# Altium PCB PCB2.PcbDoc (part 3 of 4)
Units mil, origin at the board's own origin, x right, y up, seen from the top; angles counter-clockwise.
Board outline 7874.02 x 7086.61 mil, 2 copper layers (Top Layer, Bottom Layer); 393 components, 284 nets, 1417 pads, 404 vias.
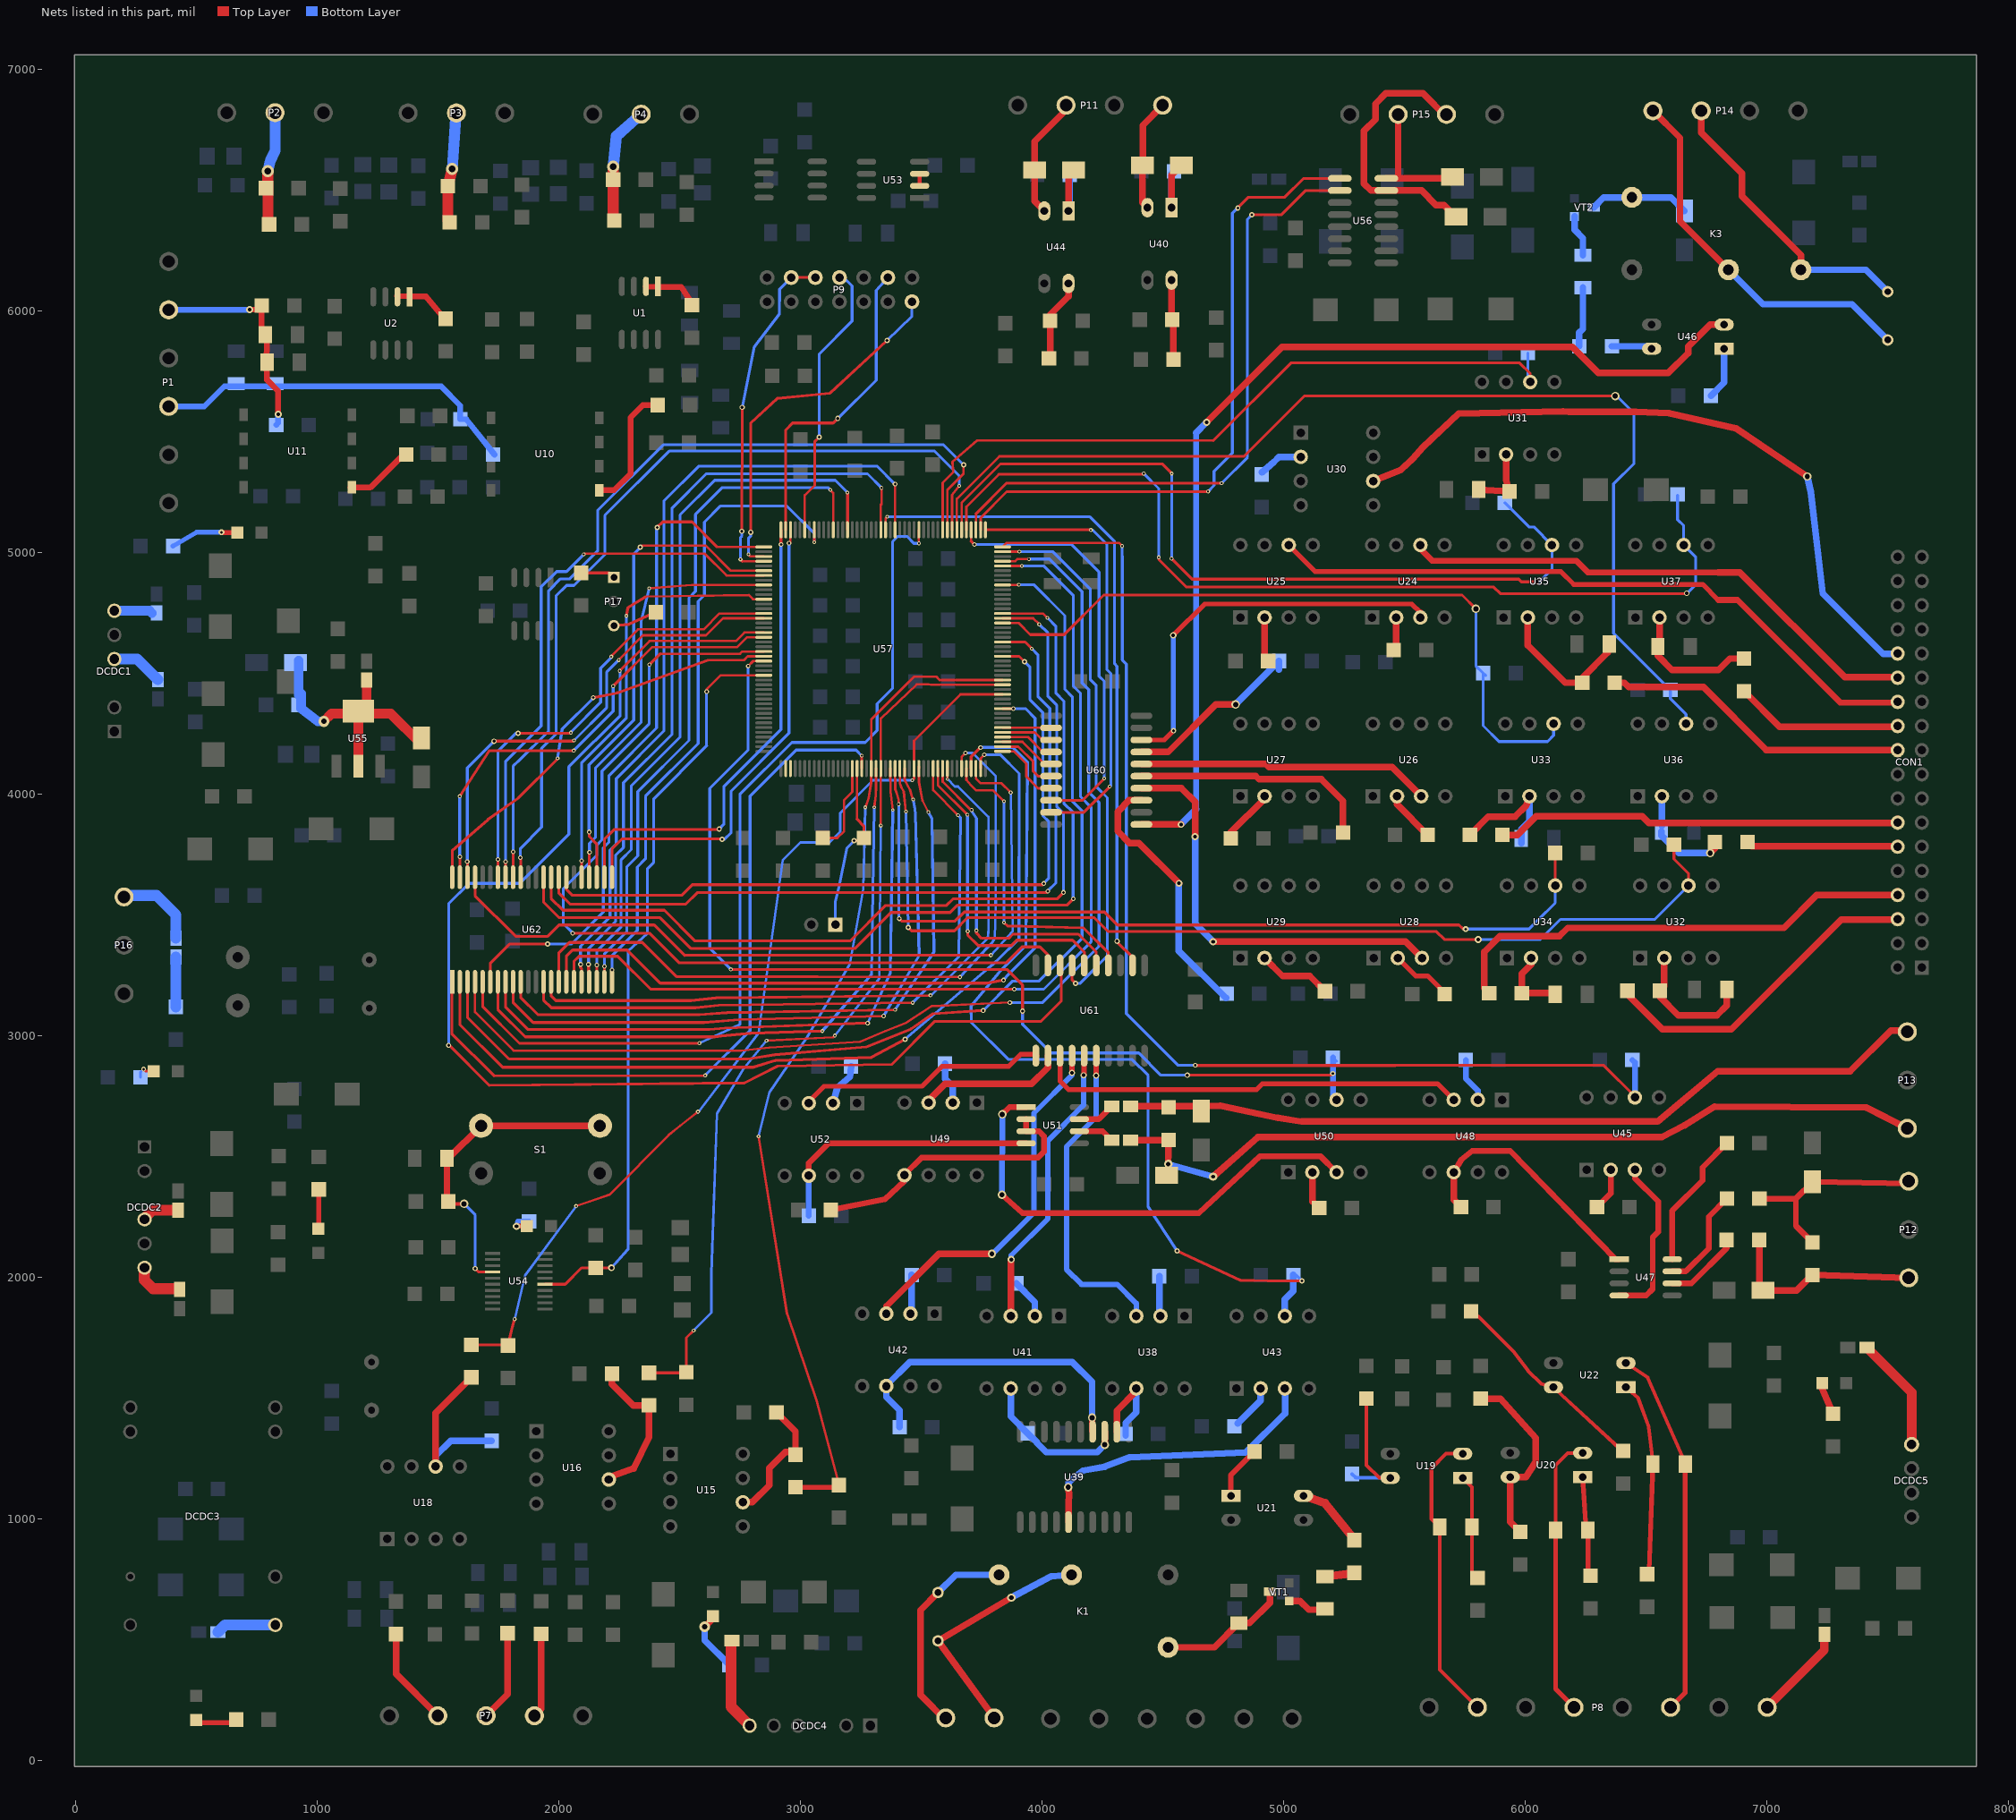
[diagram p3: the nets of this part, all layers, seen from the top]

## Via types
v1: diameter 22, hole 12, Top Layer to Bottom Layer, 63 vias
v2: diameter 19, hole 11, Top Layer to Bottom Layer, 42 vias
v3: diameter 50, hole 28, Top Layer to Bottom Layer, 34 vias
v4: diameter 15, hole 8, Top Layer to Bottom Layer, 27 vias
v5: diameter 35, hole 22, Top Layer to Bottom Layer, 25 vias
v6: diameter 16, hole 8, Top Layer to Bottom Layer, 23 vias
v7: diameter 30, hole 15, Top Layer to Bottom Layer, 22 vias
v8: diameter 22, hole 11, Top Layer to Bottom Layer, 14 vias
v9: diameter 17, hole 8, Top Layer to Bottom Layer, 13 vias
v10: diameter 35, hole 20, Top Layer to Bottom Layer, 12 vias
v11: diameter 16, hole 7, Top Layer to Bottom Layer, 10 vias
v12: diameter 18, hole 8, Top Layer to Bottom Layer, 9 vias
v13: diameter 25, hole 15, Top Layer to Bottom Layer, 8 vias
v14: diameter 40, hole 22, Top Layer to Bottom Layer, 8 vias
v15: diameter 45, hole 22, Top Layer to Bottom Layer, 7 vias
v16: diameter 25, hole 12, Top Layer to Bottom Layer, 6 vias
v17: diameter 15, hole 7, Top Layer to Bottom Layer, 6 vias
v18: diameter 15, hole 9, Top Layer to Bottom Layer, 6 vias
v19: diameter 35, hole 18, Top Layer to Bottom Layer, tented bottom, 6 vias
v20: diameter 27, hole 15, Top Layer to Bottom Layer, 5 vias
v21: diameter 40, hole 18, Top Layer to Bottom Layer, 4 vias
v22: diameter 50, hole 30, Top Layer to Bottom Layer, 4 vias
v23: diameter 14, hole 7, Top Layer to Bottom Layer, 4 vias
v24: diameter 157.48, hole 137.8, Top Layer to Bottom Layer, 4 vias
v25: diameter 35, hole 15, Top Layer to Bottom Layer, 4 vias
v26: diameter 35, hole 18, Top Layer to Bottom Layer, 3 vias
v27: diameter 25, hole 11, Top Layer to Bottom Layer, 3 vias
v28: diameter 17, hole 9, Top Layer to Bottom Layer, 3 vias
v29: diameter 22, hole 15, Top Layer to Bottom Layer, 3 vias
v30: diameter 30, hole 17, Top Layer to Bottom Layer, 2 vias
v31: diameter 20, hole 12, Top Layer to Bottom Layer, 2 vias
v32: diameter 28, hole 15, Top Layer to Bottom Layer, 2 vias
v33: diameter 45, hole 25, Top Layer to Bottom Layer, 2 vias
v34: diameter 40, hole 18, Top Layer to Bottom Layer, tented bottom, 2 vias
v35: diameter 47, hole 30, Top Layer to Bottom Layer, 1 vias
v36: diameter 30, hole 18, Top Layer to Bottom Layer, 1 vias
v37: diameter 27, hole 17, Top Layer to Bottom Layer, 1 vias
v38: diameter 12, hole 7, Top Layer to Bottom Layer, 1 vias
v39: diameter 18, hole 10, Top Layer to Bottom Layer, 1 vias
v40: diameter 45, hole 30, Top Layer to Bottom Layer, 1 vias
v41: diameter 18, hole 11, Top Layer to Bottom Layer, 1 vias
v42: diameter 26, hole 15, Top Layer to Bottom Layer, 1 vias
v43: diameter 18, hole 9, Top Layer to Bottom Layer, 1 vias
v44: diameter 50, hole 32, Top Layer to Bottom Layer, 1 vias
v45: diameter 24, hole 15, Top Layer to Bottom Layer, 1 vias
v46: diameter 50, hole 22, Top Layer to Bottom Layer, 1 vias
v47: diameter 20, hole 10, Top Layer to Bottom Layer, 1 vias
v48: diameter 17, hole 7, Top Layer to Bottom Layer, 1 vias
v49: diameter 34, hole 15, Top Layer to Bottom Layer, 1 vias
v50: diameter 35, hole 17, Top Layer to Bottom Layer, 1 vias

## Nets (pads, with @x,y where several pads share a name; then routed paths per layer and width w, separated by ;. In a path a pad name is that pad's centre, name@x,y a point inside that pad or via, vN(x,y) a via of type N, cw(c..) or ccw(c..) an arc to the next point about the centre after c; other vN are vias at no path point) (continued)
NetCON1_24: CON1.24 U25.6 | length 2798.5
  Top Layer w20: U25.6@5022,5032 5131,4923 6148,4923 6202,4869 6736,4869 6800,4805 ; CON1.24@7525,4380 CON1.24@7543,4398
  Top Layer w25: 6800,4805 6880,4805 7305,4380 CON1.24@7525,4380
NetCON1_26: CON1.26 U24.6 | length 2217.3
  Top Layer w20: U24.6@5567,5016 U24.6@5567,5032 ; CON1.26@7530,4485 CON1.26@7543,4498
  Top Layer w25: U24.6@5567,5016 5616,4967 6212,4967 6260,4919 6800,4919
  Top Layer w27.56: 6800,4919 6890,4919 7324,4485 CON1.26@7530,4485
NetCON1_28: CON1.28 U30.6 | length 2877.9
  Top Layer w27.56: U30.6@5372,5297 5488,5344 5535,5389 5578,5437 5725,5576 6157,5585 6182,5584 6460,5584 6596,5578 6874,5515 v5(7169,5316)
  Bottom Layer w27.56: v5(7169,5316) 7184,5251 7233,4832 7483,4582 7527,4582 CON1.28@7543,4598
NetD1_1: D1.1 D2.2 P1.3 R6.1 R7.2 | length 1544
  Bottom Layer w24: P1.3@385,5606 532,5606 615,5689 1513,5689 1592,5610 R7.2@1592,5553 1617,5553 R6.1@1734,5406
NetD3_1: D3.1 D4.2 P1.5 R14.1 R16.2 | length 895.8
  Top Layer w24: v7(720,6007) 753,6006 R16.2@770,6023 770,5918.07 D4.2@785.07,5903 ; D4.2@786.07,5881 792.07,5875 789,5787 792.07,5715.93 ; 792,5716 838,5670 v7(838,5573)
  Bottom Layer w24: P1.5@385,6006 719,6006 v7(720,6007) ; R14.1@830,5529 838,5537 v7(838,5573)
NetD14_1: D14.1 P8.7 U19.2 | length 1222.6
  Top Layer w15: U19.2@5742,1270 5673,1270 5613,1210 5613,1000.07 D14.1@5647.07,966 5647.07,375.93 P8.7@5803,220
NetD14_2: D14.2 R55.2 U19.1 | length 439.7
  Top Layer w15: U19.1@5742,1170 5780.93,1131.07 D14.2@5780.93,966 5780.93,779.07 R55.2@5804,756
NetD15_1: D15.1 P8.5 U20.2 | length 1167.1
  Top Layer w15: D15.1@6127.07,953 6127.07,1223.07 6177,1273 U20.2@6239,1273
  Top Layer w20: D15.1@6127.07,953 6127.07,295.93 P8.5@6203,220
NetD15_2: D15.2 R58.2 U20.1 | length 418.5
  Top Layer w15: D15.2@6253,956 D15.2@6260.93,953 ; R58.2@6260.93,776.07 R58.2@6272,765
  Top Layer w20: U20.1@6239,1173 D15.2@6253,956 ; R58.2@6260.93,776.07 D15.2@6260.93,953
NetD16_1: D16.1 VT1.2 | length 164.4
  Top Layer w27.56: VT1.2@5024,660.5 5068.5,660.5 5105,624 5168.93,624 D16.1@5172,627.07
NetD16_2: D16.2 R61.2 | length 119.8
  Top Layer w35: D16.2@5172,760.93 R61.2@5291,775
NetD17_2: D17.2 K1.6 VT1.1 | length 556.7
  Top Layer w27.56: K1.6@4522.64,468.39 4714.31,468.39 D17.2@4815,569.07 4860.07,569.07 4944,653 VT1.1@4944,698.5
  Bottom Layer w27.56: K1.6@4522.64,468.39 K1.6@4532.11,477.85
NetD18_1: D18.1 P8.3 U22.2 | length 1541.2
  Top Layer w15: U22.2@6418,1645 6508,1586 6665.23,1227.38 D18.1@6668,1218
  Top Layer w20: P8.3@6603,220 6663.93,280.93 D18.1@6663.93,1227
NetD18_2: D18.2 R63.2 U22.1 | length 808.3
  Top Layer w15: U22.1@6418,1545 6468,1502 6513,1380 D18.2@6530.07,1227 ; R63.2@6506,771 R63.2@6514,785
  Top Layer w20: R63.2@6514,785 D18.2@6530.07,1227
NetD21_2: D21.2 R77.1 U31.2 | length 282.3
  Top Layer w27.56: D21.2@5808.93,5262 R77.1@5936,5254 5922,5302 U31.2@5922,5407
NetD22_2: D22.2 R79.1 U32.2 | length 560.7
  Top Layer w27.56: U32.2@6577,3322 6577,3205 R79.1@6559,3187 6559,3161 6636,3084 6794,3084 6835.93,3125.93 D22.2@6835.93,3192
NetD23_2: D23.2 R80.1 U33.2 | length 533
  Top Layer w27.56: R80.1@5772,3832 5848,3908 5959.67,3908 6003.92,3952.25 U33.2@6018.67,3992
  Bottom Layer w27.56: D23.2@5985.07,3797 5985.07,3855.07 6018.67,3888.67 U33.2@6018.67,3992
NetD24_2: D24.2 R83.1 U34.2 | length 301
  Top Layer w27.56: U34.2@6025.33,3322 6025.33,3295.33 5987,3257 R83.1@5987,3177 6120.07,3177 D24.2@6125.07,3172
NetD25_2: D25.2 R84.1 U35.2 | length 610.6
  Top Layer w27.56: U35.2@6012,4732 6012,4617 6167,4462 R84.1@6237,4462 6237,4482 6342,4587 6342,4615.07 D25.2@6348.93,4622
NetD26_2: D26.2 R87.1 U36.2 | length 425
  Top Layer w27.56: v5(6767,3757) 6787,3777 R87.1@6787,3802
  Bottom Layer w27.56: D26.2@6565.07,3847 6565.07,3828.93 6637,3757 v5(6767,3757) ; D26.2@6567,3870.07 U36.2@6567,3992
NetD27_2: D27.2 R88.1 U37.2 | length 551.6
  Top Layer w27.56: D27.2@6550.07,4612 6550.07,4573.93 6610,4514 6801,4514 6849,4562 R88.1@6907,4562 ; D27.2@6557,4620.07 U37.2@6557,4732
NetD28_1: D28.1 P11.4 U40.2 | length 467.3
  Top Layer w27.56: U40.2@4437,6429 4416.29,6449.71 D28.1@4416.29,6604 4416.29,6633.29 4418,6635 4418,6770 4500,6852 P11.4@4500,6853
NetD28_2: D28.2 R93.1 U40.1 | length 346
  Top Layer w27.56: U40.1@4537,6429 4537,6563.29 D28.2@4577.71,6604
  Bottom Layer w27.56: U40.1@4537,6429 4537,6569 R93.1@4547,6579
NetD29_1: D29.1 P11.2 U44.2 | length 506.6
  Top Layer w27.56: U44.2@4010,6415 3969.29,6455.71 D29.1@3969.29,6585 3969.29,6703.29 4106.5,6840.5 4106.5,6841.5 P11.2@4111,6846
NetD29_2: D29.2 R100.1 U44.1 | length 330.6
  Top Layer w27.56: U44.1@4110,6415 4110,6564.29 D29.2@4130.71,6585
  Bottom Layer w27.56: U44.1@4110,6415 4115,6420 R100.1@4115,6565
NetD30_1: D30.1 VT2.2 | length 175.1
  Bottom Layer w27.56: VT2.2@6205,6392.5 6205,6338 6240,6303 D30.1@6240,6231.93
NetD30_2: D30.2 R110.2 | length 249.3
  Bottom Layer w27.56: R110.2@6225,5855 6225,5912 6240,5927 D30.2@6240,6098.07
NetD31_2: D31.2 K3.6 VT2.1 | length 415.2
  Bottom Layer w27.56: VT2.1@6285,6430.5 6326.11,6471.61 K3.6@6442.36,6471.61 6604.09,6471.61 D31.2@6660,6415.71
NetD33_1: D33.1 R123.1 S1.2 U54.4 | length 1291
  Top Layer w11.81: R123.1@1536.93,2320.33 R123.1@1543,2314.26 ; v1(1654,2036.26) 1667.61,2022.65 U54.4@1726.73,2022.65
  Top Layer w15: R123.1@1553,2304.26 v5(1608,2304.26)
  Top Layer w27.56: R123.1@1536.93,2320.33 D33.1@1536.93,2493.26 1543.67,2493.26 S1.2@1678.26,2627.85 S1.2@2170.26,2627.85
  Bottom Layer w11.81: v5(1608,2304.26) 1654,2258.26 v1(1654,2036.26)
NetD34_1: D34.1 D35.2 L14.1 R125.2 U55.2 U55.4 | length 1199.1
  Top Layer w39.37: v15(1027,4302) 1059.17,4334.17 U55.4@1170,4334.17 ; U55.2@1170,4105.83 U55.4@1170,4334.17 ; L14.1@1204,4472.63 1204,4368.17 U55.4@1170,4334.17 ; D34.1@1444,4229.71 1426.15,4211.85 1303.83,4334.17 U55.4@1170,4334.17
  Bottom Layer w39.37: D35.2@922.71,4554 922.71,4410.71 933,4416 933,4355 1002,4302 v15(1027,4302) v15@1025,4302
NetDCDC1_4: DCDC1.4 L9.1 | length 215.5
  Bottom Layer w45: DCDC1.4@160,4560 254.37,4560 L9.1@340,4474.37
NetDCDC1_6: DCDC1.6 L7.1 | length 158.9
  Bottom Layer w39.37: DCDC1.6@160,4760 305.63,4760 L7.1@315,4750.63
NetDCDC2_4: DCDC2.4 L11.1 | length 154.3
  Top Layer w45: DCDC2.4@284,2244 318.63,2278.63 L11.1@424,2278.63
NetDCDC2_6: DCDC2.6 L10.1 | length 193.3
  Top Layer w45: DCDC2.6@284,2042 284,1989 320,1953 L10.1@409.37,1953
NetDCDC3_14: DCDC3.14 L12.1 | length 250.1
  Bottom Layer w45: L12.1@588.37,531 618.37,561 DCDC3.14@826,561
NetDCDC4_6: DCDC4.6 L15.1 | length 389
  Top Layer w45: L15.1@2713,495 2713,222 DCDC4.6@2795,140
NetDCDC5_4: DCDC5.4 L16.1 | length 477.9
  Top Layer w40: L16.1@7415.37,1709 7601,1523.37 DCDC5.4@7601,1308
NetF1_1: F1.1 L8.2 | length 205.6
  Bottom Layer w45: F1.1@415,3120 L8.2@415,3325.63
NetK1_3: K1.3 P19.1 RV1.2 | length 1036
  Top Layer w27.56: P19.1@3802,176 RV1.2@3570,495 v10(3873,674)
  Bottom Layer w27.56: P19.1@3802,176 P19.1@3807,159 ; v10(3873,674) 4038,762 K1.3@4122.64,768.39
NetK1_4: K1.4 P19.2 RV1.1 | length 894.3
  Top Layer w27.56: RV1.1@3570,695 3497,622 3497,271 P19.2@3608,160
  Bottom Layer w27.56: RV1.1@3570,695 3643.39,768.39 K1.4@3822.64,768.39
NetK3_3: K3.3 P14.1 RV3.2 | length 1567.8
  Top Layer w27.56: P14.1@6530,6830 6642,6718 6642,6371.98 K3.3@6842.36,6171.61
  Bottom Layer w27.56: K3.3@6842.36,6171.61 6984.98,6029 7354,6029 RV3.2@7502,5881
NetK3_4: K3.4 P14.2 RV3.1 | length 1226.4
  Top Layer w27.56: P14.2@6730,6830 6730,6739 6898,6571 6898,6477 7142.36,6232.64 K3.4@7142.36,6171.61
  Bottom Layer w27.56: K3.4@7142.36,6171.61 7411.39,6171.61 RV3.1@7502,6081
NetL1_1: L1.1 P8.1 | length 399.8
  Top Layer w35.43: P8.1@7003,220 7240,457 L1.1@7240,521.63
NetL5_1: L5.1 U51.6 | length 149
  Top Layer w24: U51.6@4155,2605 4251.63,2605 L5.1@4288.63,2568
NetL5_2: L5.2 P13.3 R119.2 TVS3.2 | length 3491.8
  Top Layer w27.56: L5.2@4367.37,2568 4524,2568 TVS3.2@4523,2416 ; v25(4709,2417) 4895,2581 6567,2581 6659.72,2628.72 ; 6660.72,2628.72 6785,2707 7412,2704 P13.3@7583,2617
  Bottom Layer w27.56: v10(4523,2469) v25(4709,2417)
NetL6_1: L6.1 U51.7 | length 155.6
  Top Layer w24: U51.7@4155,2655 4235.63,2655 L6.1@4288.63,2708
NetL6_2: L6.2 P13.1 R119.1 TVS6.1 | length 3374.7
  Top Layer w27.56: L6.2@4367.37,2708 4650.71,2708 4739,2711 4978,2660 5075,2645 6549,2645 6798,2853 7346,2853 7515,3022 P13.1@7590,3021
NetL8_1: L8.1 P16.3 | length 335.8
  Bottom Layer w45: P16.3@209,3581 335,3581 415,3501 L8.1@415,3404.37
NetLED1_K: 24V_IN.K R134.2 | length 83.7
  Top Layer w10: v31(281,2862) 289,2854 24V_IN.K@322,2854
  Bottom Layer w10: R134.2@268,2828 268,2849 v31(281,2862)
NetLED2_K: +15V_C.K R135.2 | length 157
  Top Layer w20: +15V_C.K@1006,2207 R135.2@1006,2364
NetLED3_K: +15V_A.K R136.2 | length 280.4
  Top Layer w20: v27@605,5083 +15V_A.K@669,5083 ; +15V_A.K@669,5085 +15V_A.K@670,5085
  Bottom Layer w20: R136.2@403,5028 501,5085 v27(603,5085)
NetLED4_K: 3.3V.K R137.2 | length 109.6
  Top Layer w20: v7(1825,2212) 3.3V.K@1867,2212
  Bottom Layer w20: v7(1825,2212) 1830,2232 R137.2@1877,2232
NetLED5_K: +12V_P.K R138.2 | length 259.3
  Top Layer w27.56: v15(2604,553) 2638,587 +12V_P.K@2638,598
  Bottom Layer w27.56: v15(2604,553) 2604,497 R138.2@2706,395
NetLED6_K: +5V.K R139.2 | length 166.4
  Top Layer w20: +5V.K@503,156 651,156 R139.2@664,169
NetLED7_K: +5V_COM.K R140.2 | length 156.6
  Top Layer w27.56: +5V_COM.K@7231,1563 7224,1556 R140.2@7276,1435 R140.2@7264,1426
NetP2_2: P2.2 R2.1 R5.2 | length 441.9
  Top Layer w45: v3(795,6580) R2.1@796,6383 ; P2.2@819,6816 P2.2@826,6809
  Bottom Layer w45: v3(795,6580) 805,6622 826,6665 P2.2@826,6809
NetP3_2: P3.2 R9.1 R10.2 | length 465.7
  Top Layer w45: R9.1@1548,6368 1541,6375 R10.2@1541,6518 v3(1559,6589)
  Bottom Layer w45: v3(1559,6589) P3.2@1575,6828
NetP4_2: P4.2 R15.1 R18.2 | length 495.2
  Top Layer w45: v3(2225,6599) R18.2@2225,6545 2225,6380 R15.1@2230,6375
  Bottom Layer w45: v3@2225,6594 2238,6725 P4.2@2341,6816
NetP7_2: P7.2 R44.1 | length 350.6
  Top Layer w27.56: P7.2@1899,185 1927,213 R44.1@1927,524
NetP7_3: P7.3 R47.1 | length 378.9
  Top Layer w27.56: P7.3@1699,185 1788,274 R47.1@1788,527
NetP7_4: P7.4 R53.1 | length 409.7
  Top Layer w27.56: R53.1@1326,523 1326,358 P7.4@1499,185
NetP12_1: P12.1 R111.1 R112.2 TVS2.2 | length 846.9
  Top Layer w27.56: R112.2@6970,2155 6970,1960.71 6985.71,1945 7125,1945 R111.1@7190,2010 P12.1@7589,1998
NetP12_3: P12.3 R107.2 R111.2 TVS1.1 | length 867.1
  Top Layer w24: R107.2@6971,2326 7121.71,2326 ; R111.2@7190,2145 7121.71,2213.29 7121.71,2326 ; TVS1.1@7190,2395.29 TVS1.1@7191,2395.29 ; P12.3@7599,2388 TVS1.1@7191,2395.29 ; 7121.71,2326 TVS1.1@7191,2395.29
NetP17_1: P17.1 R132.2 | length 142.9
  Top Layer w11.81: R132.2@2093,4917 2209,4917 P17.1@2228,4898
NetP17_3: P17.3 R131.1 | length 185
  Top Layer w11.81: P17.3@2228,4698 2291,4704 R131.1@2402,4754
NetP18_1: P18.1 R133.2 U57.17 | length 709.8
  Top Layer w10: 3234.73,3897.27 U57.17@3234.73,4106.91
  Top Layer w11.81: v8(3223,3808) R133.2@3252,3808 ; 3234.73,3897.27 3263,3869 R133.2@3263,3819
  Top Layer w27.56: R133.2@3252,3808 R133.2@3263,3819
  Bottom Layer w11.81: P18.1@3145,3460 3145,3555 3160,3614 3193,3778 v8(3223,3808)
NetR3_1: R3.1 U1.1 U1.2 | length 240.6
  Top Layer w24: U1.2@2361,6103 2410,6101 2507,6101 R3.1@2559,6022
NetR4_2: R4.2 U10.1 | length 526.8
  Top Layer w24: U10.1@2164.47,5259 2229,5259 2297,5327 2297,5560 2348,5611 R4.2@2409,5611
NetR12_1: R12.1 U2.1 U2.2 | length 246.8
  Top Layer w24: U2.2@1331,6063 1382,6061 1450,6061 R12.1@1532,5963
NetR13_2: R13.2 U11.1 | length 286.3
  Top Layer w24: U11.1@1138.47,5270 1220,5270 1357,5407 R13.2@1368,5407
NetR42_1: R42.1 R43.1 U15.6 | length 542.5
  Top Layer w27.56: U15.6@2762,1069 2801,1069 2871,1139 2871,1210 2938,1277 2980,1277 2980,1362 R42.1@2901,1441
NetR45_1: R45.1 R46.1 U16.6 | length 626.5
  Top Layer w27.56: U16.6@2207,1163 2207,1172 2310,1209 2373,1338 R46.1@2373,1470 2308,1470 2220,1558 R45.1@2220,1601
NetR51_1: R51.1 R52.1 U18.6 | length 732
  Top Layer w27.56: U18.6@1490,1217 1490,1438 R52.1@1638,1586
  Bottom Layer w27.56: U18.6@1490,1217 1490,1261 1552,1323 R51.1@1722,1323
NetR54_1: R54.1 R56.1 U19.4 | length 559.6
  Top Layer w15: R56.1@5344,1498 5344,1223 5397,1170 U19.4@5442,1170
  Bottom Layer w15: R54.1@5284,1186 5300,1170 U19.4@5442,1170
NetR57_1: R57.1 R59.1 U20.4 | length 782.8
  Top Layer w27.56: R59.1@5817,1498 5898,1498 6044,1335 6044,1236 6004,1173 U20.4@5939,1173 5939,988 R57.1@5981,946
NetR60_2: R60.2 U21.1 | length 223.2
  Top Layer w22: U21.1@4783,1096 4783,1182 R60.2@4880,1279
NetR61_1: R61.1 U21.4 | length 283.7
  Top Layer w35: U21.4@5083,1096 5173,1065 R61.1@5291,918
NetR62_1: R62.1 R64.1 U22.4 | length 847
  Top Layer w15: R64.1@5777,1859 5809,1837 5953,1693 6013,1614 6067,1560 U22.4@6118,1545 6128,1536 R62.1@6394,1290
NetR67_2: R67.2 U24.2 | length 139.1
  Top Layer w27.56: R67.2@5457,4597 5467,4607 U24.2@5467,4732
NetR68_2: R68.2 U25.2 | length 186.2
  Top Layer w27.56: U25.2@4922,4732 4922,4567 R68.2@4937,4552
NetR69_2: R69.2 U26.2 | length 212.5
  Top Layer w27.56: U26.2@5470.33,3992 5470.33,3958.67 R69.2@5597,3832
NetR71_2: R71.2 U27.2 | length 233
  Top Layer w27.56: R71.2@4782,3817 4782,3842 4922,3982 U27.2@4922,3992
NetR74_2: R74.2 U28.2 | length 243.1
  Top Layer w20: U28.2@5473.67,3322 5547.67,3248 5597,3248 R74.2@5660,3185
NetR75_2: R75.2 U29.2 | length 306.7
  Top Layer w27.56: U29.2@4922,3322 4997,3247 5110,3247 R75.2@5172,3185
NetR76_2: R76.2 U30.2 | length 185.6
  Bottom Layer w27.56: R76.2@4911,5333 4962,5377 4982,5397 U30.2@5072,5397
NetR78_1: R78.1 U31.6 U57.98 | length 3035.3
  Top Layer w10: U57.98@3589.06,5095.09 3589.06,5290.06 3633,5334 3630,5377 3732,5465 4710,5465
  Top Layer w11.81: 4710,5465 5031,5786 5978,5786 6022,5742 U31.6@6022,5707
  Bottom Layer w11.81: R78.1@6012,5827 6012,5717 U31.6@6022,5707
NetR81_1: R81.1 U32.6 U57.26 | length 4244.5
  Top Layer w10: U57.26@3411.9,4106.91 3411.9,4045.1 3419,4027 3428,4012 v4(3436.87,3928)
  Top Layer w11.81: v8(3447,3448) 3460,3435 3638,3435 3692.41,3489.41 4216.59,3489.41 4274,3432 5633,3432 ; 5634,3431 5666,3399 v7(5806,3399) ; R81.1@6617,3792 6617,3732 6677,3672 U32.6@6677,3622
  Bottom Layer w11.81: v4(3436.87,3928) v8(3447,3448) ; v7(5806,3399) 6064,3399 6147,3482 6537,3482 U32.6@6677,3622
NetR82_1: R82.1 U33.6 U57.72 | length 2960.6
  Top Layer w10: U57.72@3837.09,4709.27 3904.73,4709.27 3953,4661
  Top Layer w11.81: 3953,4661 4092,4661 4256,4825 5740,4825 v5(5797,4768)
  Bottom Layer w11.81: v5@5797,4769 v5(5797,4768) 5797,4532 R82.1@5827,4502 ; R82.1@5837,4492 R82.1@5827,4502 ; U33.6@6118.67,4292 6118.67,4243.67 6093.5,4218.5 5892.5,4218.5 5827,4284 R82.1@5827,4502
NetR85_1: R85.1 U34.6 U57.25 | length 3656.8
  Top Layer w10: U57.25@3392.21,4106.91 3393,4021 3400,4003 3407,3978 v4(3407,3959)
  Top Layer w11.81: v2(3409,3485) 3419,3475 3641,3475 3679,3513 4259,3513 4313.12,3458.88 5727,3458.88 5743.88,3442 v27(5755,3442) ; U34.6@6125.33,3622 R85.1@6125.33,3765
  Bottom Layer w11.81: v4@3408,3959 3408,3486 v2(3409,3485) ; v27(5755,3442) 6017,3442 6052,3477 ; 6047,3472 6052,3477 ; U34.6@6125.33,3622 6125.33,3550.33 6052,3477
NetR86_1: R86.1 U35.6 U57.94 | length 3421
  Top Layer w10: U57.94@3667.8,5095.09 3667.8,5206.8 3829,5368
  Top Layer w11.81: 3829,5368 4498,5368 v11(4538,5328) ; v6(4537,4976) 4622,4891 5974,4891 5985,4880 v29(6050,4880)
  Bottom Layer w11.81: v6@4538,4976 v11(4538,5328) ; R86.1@5917,5207 6017,5107 6037,5107 U35.6@6112,5032 6112,4932 6060,4880 v29(6050,4880)
NetR89_1: R89.1 U36.6 U57.95 | length 4586.3
  Top Layer w10: U57.95@3648.12,5095.09 3648.12,5223.12 3824,5399
  Top Layer w11.81: 3824,5399 4836,5399 5086,5649 6372,5649 6374,5651 v5(6374,5649)
  Bottom Layer w11.81: v5(6374,5649) v5@6374,5651 ; v5@6376,5653 6451,5578 6451,5369 6367,5285 6367,4667 R89.1@6602,4432 6602,4396 6667,4331 U36.6@6667,4292
NetR90_1: R90.1 U37.6 U57.93 | length 3981.8
  Top Layer w10: U57.93@3687.49,5095.09 3687.49,5190.49 3822,5325
  Top Layer w11.81: 3822,5325 4419,5325 v6(4422,5328) ; v6(4484,4981) 4484,4973 4599,4858 4679,4858 ; 4661,4858 4679,4858 ; v29@6670,4831 5898,4831 5871,4858 4679,4858
  Bottom Layer w11.81: v6(4422,5328) 4484,5266 v6(4484,4981) ; R90.1@6632,5237 6632,5137 6657,5112 U37.6@6657,5032 6707,4982 6707,4869 v29(6670,4832)
NetR91_2: R91.2 U38.2 | length 167.1
  Bottom Layer w27.56: R91.2@4486,2005 4486,1845 U38.2@4491,1840
NetR92_1: R92.1 U38.6 U39.2 | length 425.8
  Top Layer w27.56: U39.2@4310,1361.01 4310,1448 4391,1529 U38.6@4391,1540
  Bottom Layer w27.56: R92.1@4347,1345 4347,1397 4391,1441 U38.6@4391,1540
NetR94_1: R94.1 R95.2 U40.4 | length 332.3
  Top Layer w27.56: U40.4@4537,6129 4537,5968 4545,5960 R95.2@4545,5800
NetR96_2: R96.2 U41.2 | length 166.9
  Bottom Layer w27.56: R96.2@3894,1975 3971,1898 U41.2@3971,1840
NetR97_1: R97.1 U39.3 U41.6 | length 612.5
  Top Layer w27.56: v5(4260,1307) U39.3@4260,1361.01
  Bottom Layer w27.56: U41.6@3871,1540 3871,1425 R97.1@3941,1355 3979,1317 3979,1315 4018.01,1276 4229,1276 4245,1292
NetR98_2: R98.2 U42.2 | length 162.1
  Bottom Layer w27.56: U42.2@3456,1850 3461,1855 R98.2@3461,2010
NetR99_1: R99.1 U39.4 U42.6 | length 1327.7
  Top Layer w27.56: v5(4208,1419) 4208,1363.01 U39.4@4210,1361.01
  Bottom Layer w27.56: R99.1@3411,1380 3411,1450 3356,1505 U42.6@3356,1550 3356,1552 3453,1649 4126,1649 4208,1567 v5(4208,1419)
NetR101_1: R101.1 R103.2 U44.4 | length 343.6
  Top Layer w27.56: R103.2@4029,5805 4034,5810 R101.1@4034,5960 4034,5986 4110,6062 U44.4@4110,6115
NetR102_2: R102.2 U43.2 | length 205.4
  Bottom Layer w27.56: R102.2@4811,1395 4906,1490 U43.2@4906,1540 U43.2@4906,1519
NetR104_1: R104.1 U43.6 U57.41 | length 3845.2
  Top Layer w11.81: U57.41@3707.17,4106.91 3707.17,4155.17 v2(3746,4194) ; v8(4560,2110) 4823,1988 4935,1986 v8(5076,1986)
  Bottom Layer w11.81: v2(3746,4194) 3879,4194 3940,4133 3934,3374 3835.25,3275.25 3821,3261 3707,3124 3708,3055 3862,2902 4374,2902 4440,2836 4440,2293 4556,2115 v8(4560,2110) ; R104.1@5041,2010 5052,2010 v8(5076,1986)
  Bottom Layer w27.56: U43.6@5006,1840 5006,1909 5041,1944 R104.1@5041,2010
NetR105_2: R105.2 U45.2 | length 177.2
  Top Layer w24: R105.2@6299,2291 6299,2292 6355,2348 U45.2@6355,2445
NetR106_1: R106.1 U45.6 U57.88 | length 4861.2
  Top Layer w10: U57.88@3837.09,5024.23 3853.87,5041 4319,5041 v6(4332,5028)
  Top Layer w11.81: v2(4635,2878) 4635.41,2877.59 5464.11,2877.59 5464.51,2878 6326,2878 6455,2749 U45.6@6455,2745
  Bottom Layer w11.81: v6(4332,5028) 4332,4986 4333,4985 4333,4556 4350,4539 4350,3092 4564,2878 v2(4635,2878)
  Bottom Layer w24: R106.1@6445,2900 6455,2890 U45.6@6455,2745
NetR107_1: R107.1 U47.7 | length 427.4
  Top Layer w24: U47.7@6610,2025 6666,2025 6761,2120 6761,2251 R107.1@6836,2326
NetR108_1: R108.1 U47.8 | length 574.6
  Top Layer w24: U47.8@6610,2075 6610,2276 6735,2401 6735,2455 R108.1@6836,2556
NetR109_2: R109.2 U46.1 | length 217.8
  Bottom Layer w27.56: R109.2@6770,5650 6825,5705 U46.1@6825,5845
NetR110_1: R110.1 U46.4 | length 169.1
  Bottom Layer w27.56: R110.1@6360,5855 6515,5855 U46.4@6525,5845
NetR112_1: R112.1 U47.6 | length 319.5
  Top Layer w24: U47.6@6610,1975 6689,1975 6835,2121 R112.1@6835,2155
NetR113_2: R113.2 U48.2 | length 185.7
  Bottom Layer w24: R113.2@5755,2900 5755,2824 5805,2774 U48.2@5805,2735
NetR114_1: R114.1 U47.1 U48.6 | length 1072.7
  Top Layer w24: U48.6@5705,2435 5736,2487 5781,2523 5939,2523 6375,2075 U47.1@6390,2075
  Top Layer w27.56: U48.6@5705,2435 5705,2321 R114.1@5735,2291
NetR115_2: R115.2 U49.2 | length 175.3
  Bottom Layer w27.56: R115.2@3599,2885 3599,2822 3631,2790 U49.2@3631,2723
NetR116_1: R116.1 U49.5 U51.2 U51.3 | length 1200
  Top Layer w24: R116.1@3126,2279 3350,2323 3431,2399 U49.5@3431,2423 3431,2425 3502,2496 3984,2496 4008,2520 4008,2585 3988,2605 U51.3@3935,2605 U51.2@3935,2655
  Bottom Layer w27.56: U49.5@3431,2401 U49.5@3431,2423
NetR117_2: R117.2 U50.2 | length 162.4
  Top Layer w27.56: U50.2@5120,2435 5120,2315 R117.2@5150,2285
NetR118_1: R118.1 U50.6 U57.157 | length 4412.6
  Top Layer w10: v43(2784,4531) 2804.79,4551.79 U57.157@2848.91,4551.79
  Top Layer w11.81: v6(2712,3275) 3855,3275 3920,3210 v1@3920,3095 ; v1(4602,2837) 5197,2837 v8(5204,2844)
  Bottom Layer w11.81: v6(2712,3275) 2625,3362 2625,4025 2784,4184 v43(2784,4531) ; v1(3920,3102) 3920,3047 4037.91,2929.09 4364.86,2929.09 4400.91,2929.09 4493,2837 v1(4602,2837) ; R118.1@5205,2910 R118.1@5220,2895
  Bottom Layer w24: R118.1@5205,2910 5205,2750 U50.6@5220,2735
NetR120_2: R120.2 U52.2 | length 178.9
  Bottom Layer w27.56: U52.2@3135,2721 3153,2785 3206,2831 R120.2@3210,2873
NetR121_1: R121.1 U51.4 U52.6 | length 1152
  Top Layer w24: U52.6@3035,2421 3035,2473 3117,2555 U51.4@3935,2555
  Bottom Layer w24: R121.1@3035,2255 U52.6@3035,2421
NetR124_1: R124.1 U54.15 U57.160 | length 3123
  Top Layer w10: v47(2612,4425) 2613.5,4426.5 2613.5,4435.5 2671,4493 ; 2671.27,4492.73 U57.160@2848.91,4492.73
  Top Layer w11.81: U54.15@1943.27,1971.46 2026.2,1971.46 2094,2039.26 R124.1@2153,2039.26 v32(2218,2039.26)
  Bottom Layer w11.81: v32(2218,2039.26) 2287,2116.26 2287,3352 2367,3424 2367,3693 2393,3719 2393,3982 2612,4201 2611,4202 2611,4424 v47(2612,4425)
NetR130_2: R130.2 U57.16 | length 393.6
  Top Layer w10: 3153,3819 3181,3847 3181,3976 3215.05,4010.05 U57.16@3215.05,4106.91
  Top Layer w11.81: R130.2@3093,3839 R130.2@3093,3819 3153,3819
NetU38_3: U38.3 U61.16 | length 1331.8
  Top Layer w22: v20(4225,2836) U61.16@4225,2917.99
  Bottom Layer w22: 4222.5,2661.5 4102,2541 4102,2145 4102,2033 4164,1971 4312,1971 4391,1892 U38.3@4391,1840 ; 4225,2664 v20(4225,2836)
NetU39_15: U39.15 U43.3 | length 1260.5
  Top Layer w27.56: v5(4109,1131) 4112,1105 4110,1060 U39.15@4110,986.99
  Bottom Layer w27.56: v5(4109,1131) 4110.91,1152 4170,1200 4260,1216 4363,1255 4845,1275 5007,1437 U43.3@5007,1543
NetU41_3: U41.3 U61.15 | length 1189.6
  Top Layer w22: v13@4175,2839 U61.15@4175,2917.99
  Top Layer w27.56: U41.3@3871,1840 3872,1840 v30@3872,2068
  Bottom Layer w22: v30(3873,2074) 3873,2091 4025,2243 4025,2566 4169,2710 ; 4173,2714 v13(4173,2837)
NetU42_3: U42.3 U61.14 | length 1507.5
  Top Layer w22: v13(4125,2847) U61.14@4125,2917.99
  Top Layer w27.56: U42.3@3356,1850 3356,1880 3573,2097 v10@3792,2097
  Bottom Layer w22: v10@3800,2101 3967,2268 3967,2680 4125,2838 v13(4125,2847)
  other v10: 3793,2097
NetU45_3: U45.3 U47.4 | length 692.9
  Top Layer w24: U47.4@6390,1925 6502,1925 6529,1952 6529,2166 6552,2189 6552,2314 6455,2411 U45.3@6455,2445
NetU46_2: U46.2 U60.11 | length 4302.9
  Top Layer w27.56: U60.11@4412.01,3875 v20(4576,3875) ; v7(4682,5540) 4994,5852 6196,5852 6304,5744 6593,5744 6676,5827 6676,5854 6767,5945 U46.2@6825,5945
  Bottom Layer w25: 4639,3938 4639,5336 ; 4639,5350 4639,5336 ; 4639,5497 4639,5336
  Bottom Layer w27.56: v20(4576,3875) 4639,3938 ; 4639,5497 v7(4682,5540)
NetU48_3: U48.3 U61.13 | length 1788
  Top Layer w20: U61.13@4075,2917.99 4075,2813 4111,2777 4888,2777 4913,2802 5638,2802 U48.3@5705,2735
NetU49_3: U49.3 U61.12 | length 609.3
  Top Layer w27.56: U49.3@3531,2723 3531,2733 3599,2801 3957,2801 4025,2869 U61.12@4025,2917.99
NetU50_3: U50.3 U51.1 | length 1976.2
  Top Layer w24: v10(3835,2342) 3920,2266 4650,2266 4903,2502 5153,2502 U50.3@5220,2435 ; v5(3836,2675) 3866,2705 U51.1@3935,2705
  Bottom Layer w24: v10@3835,2345 v5(3836,2675)
NetU52_3: U52.3 U61.11 | length 1029.8
  Top Layer w20: U52.3@3035,2728 3098,2791 3504,2791 3587,2874 3862.76,2874 3911.75,2922.99 U61.11@3970,2922.99
  Top Layer w27.56: U52.3@3035,2721 U52.3@3035,2728 ; U61.11@3970,2922.99 U61.11@3975,2917.99
NetU53_2: U53.2 U53.3 | length 50
  Top Layer w15: U53.2@3494,6519 U53.3@3494,6569
NetU56_9: U56.9 U57.90 | length 2734.3
  Top Layer w10: U57.90@3746.54,5095.09 3746.54,5144.54 3855,5253
  Top Layer w11.81: 3855,5253 4687,5253 v9(4688,5254) ; v8(4811,6428) 4855,6472 5006,6472 5084,6550 U56.9@5233.54,6550
  Bottom Layer w11.81: v9(4688,5254) 4713,5279 4713,5337 4789,5413 4789,6406 v8(4811,6428)
NetU56_10: U56.10 U57.91 | length 2705.3
  Top Layer w10: U57.91@3726.86,5095.09 3726.86,5161.86
  Top Layer w11.81: 3726.86,5161.86 3853,5288 v6(4744,5288) ; v8(4869,6399) 4991,6399 5092,6500 U56.10@5233.54,6500
  Bottom Layer w11.81: v6(4744,5288) 4851,5395 4851,6381 v8(4869,6399)
NetU57_2: U57.2
NetU57_3: U57.3
Netu57_18: U57.18 U62.1 | length 3180.2
  Top Layer w10: U57.18@3254.42,4106.91 v18(3254.42,4160)
  Top Layer w11.81: U62.1@1558.72,3223.69 1557,3221.98 1557,3009 1732,2834 v9(2606,2836)
  Bottom Layer w11.81: v9(2606,2836) 2604,2834 2792,3022 2792,3993 2982,4183 3231,4183 v18@3254.21,4159.79
Netu57_21: U57.21 U62.7 | length 2669.1
  Top Layer w10: v23(3306,3946) 3312,3996 3313,4030 3313,4069 U57.21@3313.47,4106.91
  Top Layer w11.81: U62.7@1747.69,3223.69 1747.69,3109.31 1861,2996 2647,2996 2672,2999.57 2794,3011 v11(3091,3020)
  Bottom Layer w11.81: v11(3091,3020) 3295,3255 v23(3306,3946)
Netu57_24: U57.24 U62.8 | length 2767.4
  Top Layer w10: U57.24@3372.53,4106.91 3373,4012 v23(3382.97,3935)
  Top Layer w11.81: U62.8@1779.19,3223.69 1779.19,3119.81 1873,3026 2624,3026 2687,3032 v2(3279,3053) ; 3372.53,4057.47 U57.24@3372.53,4106.91
  Bottom Layer w11.81: v2(3279,3053) 3372.53,3260.53 v23(3382.97,3935)
Netu57_27: U57.27 U62.9 | length 2728.4
  Top Layer w10: U57.27@3431.58,4106.91 3431.58,4060.42 3454,4019 3461,3995 v4(3467,3978)
  Top Layer w11.81: U62.9@1810.69,3223.69 1810.69,3138.31 1894,3055 2601,3055 2747,3067 v2(3345,3082)
  Bottom Layer w11.81: v2(3345,3082) 3492,3333 3476,3918 3475,3939 v4(3467,3978)
Netu57_30: U57.30 U62.10 | length 2717.2
  Top Layer w10: U57.30@3490.64,4106.91 3491,4050 3505,3976 ; 3506,3974 v4(3530,3926)
  Top Layer w11.81: U62.10@1842.18,3223.69 1842.18,3158.82 1913,3088 2583,3088 2696,3096 3395,3108 v18(3392.5,3108) ; U57.30@3490.64,4106.91 U57.30@3490.64,4115.91
  Bottom Layer w11.81: v18(3392.5,3108) 3554,3348 ; v4(3530,3926) 3545,3900 3553,3347
Netu57_33: U57.33 U62.13 | length 2714
  Top Layer w10: U57.33@3549.69,4106.91 3549.69,4017.31 v4(3653,3914)
  Top Layer w11.81: U62.13@1936.67,3223.69 1936.67,3148.33 1969,3116 2567,3116 2661,3126 v6(3465,3137)
  Bottom Layer w11.81: v6(3465,3137) 3656,3327 3663,3904 v4(3653,3914)
Netu57_34: U57.34 U61.6 | length 1329.7
  Top Layer w10: U57.34@3569.38,4106.91 3569.38,4037.62 v4@3694,3913
  Top Layer w11.81: v9(3693,3433) 3693,3417 3736,3374 3874,3374 3896,3396 4127,3396 4176,3347 4176,3293.01 U61.6@4175,3292.01
  Bottom Layer w11.81: v4(3691.91,3915.09) 3692,3434 v9(3693,3433)
Netu57_35: U57.35 U61.5 | length 1337.2
  Top Layer w10: U57.35@3589.06,4106.91 3589.06,4051.94 v4@3707,3934
  Top Layer w11.81: v9(3729,3436) 3729,3425 3750,3404 3863,3404 3880,3421 4151,3421 4225,3347 U61.5@4225,3292.01
  Bottom Layer w11.81: v4(3709,3935) 3708,3935 3707.05,3934.05 3729,3901.1 3729,3591 3729,3574 v9(3729,3436)
Netu57_36: U57.36 U62.14 | length 2754.3
  Top Layer w10: v38(3609,4063) U57.36@3609,4106.65
  Top Layer w11.81: U62.14@1968.17,3223.69 1968.17,3165.83 1988,3146 2548,3146 2650,3157 v9(3538.97,3167.75) ; U57.36@3608.75,4106.91 U57.36@3609,4106.65
  Bottom Layer w10: v9(3538.97,3167.75) 3540.93,3167.93 3776.5,3403.5 3779,3443 3779,3580 3779,3581 3779,3906 3653,4032 3640,4032 v38(3609,4063)
Netu57_39: U57.39 U62.15 | length 2980.1
  Top Layer w10: U57.39@3667.8,4106.91 3667.8,4154.8 v2(3684,4171)
  Top Layer w11.81: U62.15@1999.66,3223.69 1999.66,3342.66 2044,3387 2346,3387 2487,3246 v9(3660.93,3243)
  Bottom Layer w10: 3713,4171 3809,4075 3809,3562 ; 3805,3404 3809,3540
  Bottom Layer w11.81: v9(3660.93,3243) 3774,3364.13 3794,3386 3805,3404 ; v2(3684,4171) 3713,4171 ; 3809,3540 3809,3562
Netu57_40: U57.40 U61.4 | length 1274.8
  Top Layer w10: U57.40@3687.49,4106.91 3687.49,4059.51 3706,4038 3728,4016 3798,4016 v4(3843,3971)
  Top Layer w11.81: v4(3843,3469) 3858,3455 4172,3447 4275,3344 U61.4@4275,3292.01
  Bottom Layer w10: v4(3843,3469) 3843,3553 3843,3556 v4(3843,3971)
Netu57_42: U57.42 U62.41 | length 3272.3
  Top Layer w10: U57.42@3726.86,4106.91 3726.86,4065.14 3746,4046 3833,4046 v28(3871,4008)
  Top Layer w11.81: U62.41@1653.2,3656.76 1653.2,3579.8 1821,3412 1954,3412 2001,3459 2395,3459 2521,3333 v9(3789,3334)
  Bottom Layer w10: v9(3789,3334) 3879,3433 v28@3872,4008
Netu57_43: U57.43 U62.2 | length 3669.8
  Top Layer w10: 3746.54,4148.54 v2(3762,4164)
  Top Layer w11.81: U62.2@1590.21,3223.69 1590.21,3046.79 1767,2870 2805,2870 2897,2898 3295,2911 v1(3434,2986) ; U57.43@3746.54,4106.91 3746.54,4148.54
  Bottom Layer w11.81: v1(3434,2986) 3758,3262 3811,3308 3905,3402 3906,4086 3828,4164 v2(3762,4164)
Netu57_45: U57.45 U60.7 | length 295.2
  Top Layer w10: U57.45@3837.09,4177.77 3884.23,4177.77 3936,4126
  Top Layer w11.81: 3936,4126 3936,4073 3984,4025 U60.7@4037.99,4025
Netu57_46: U57.46 U60.6 | length 275.1
  Top Layer w10: U57.46@3837.09,4197.46 3902.54,4197.46 3963,4137
  Top Layer w11.81: 3963,4137 3963,4097 3985,4075 U60.6@4037.99,4075
Netu57_47: U57.47 U60.5 | length 239.1
  Top Layer w10: U57.47@3837.09,4217.14 3919.86,4217.14 U60.5@4012,4125
  Top Layer w11.81: U60.5@4012,4125 U60.5@4037.99,4125
Netu57_48: U57.48 U60.4 | length 226.5
  Top Layer w10: U57.48@3837.09,4236.83 3943.17,4236.83 U60.4@4005,4175
  Top Layer w11.81: U60.4@4005,4175 U60.4@4037.99,4175
Netu57_49: U57.49 U60.3 | length 214
  Top Layer w10: U57.49@3837.09,4256.51 3970.49,4256.51 U60.3@4002,4225
  Top Layer w11.81: U60.3@4002,4225 U60.3@4037.99,4225
Netu57_50: U57.50 U60.2 | length 201.4
  Top Layer w10: U57.50@3837.09,4276.2 U60.2@4036.8,4276.2
  Top Layer w11.81: U60.2@4036.8,4276.2 U60.2@4037.99,4275
Netu57_54: U57.54 U62.16 | length 3272.9
  Top Layer w11.81: U62.16@2031.16,3223.69 2031.16,3329.16 2057,3355 2283,3355 2420,3218 3773,3218 v2(3841,3231) ; U57.54@3837.09,4354.94 v2(3881.94,4354.94)
  Bottom Layer w11.81: v2(3841,3231) 3864,3257 3972,3365 3972,4315 3932.06,4354.94 v2(3881.94,4354.94)
Netu57_65: U57.65 U62.29 | length 3125.7
  Top Layer w10: U57.65@3837.09,4571.47 3906,4571.47 v1(3928,4549.47)
  Top Layer w11.81: U62.29@2031.16,3656.76 2031.16,3606.84 2056.16,3581.84 2508.84,3581.84 2553,3626 4003,3626 v2(4008,3631)
  Bottom Layer w11.81: v1(3928,4549.47) 3950,4527.47 3950,4393 4004,4339 4004,3912 4028,3888 4028,3651 v2(4008,3631)
Netu57_68: U57.68 U62.30 | length 3322.6
  Top Layer w10: U57.68@3837.09,4630.53 3930.47,4630.53
  Top Layer w11.81: U62.30@1999.66,3656.76 1999.66,3592.34 2047,3545 2525,3545 2573,3593 4018,3593 v2(4024,3599) ; 3930.47,4630.53 v4(3958,4603)
  Bottom Layer w11.81: v4(3958,4603) 3983.5,4577.5 3983.5,4405.5 4033,4356 4033,3938 4058,3913 4058,3638 4058,3633 v2(4024,3599)
Netu57_73: U57.73 U62.31 | length 3679.9
  Top Layer w10: U57.73@3837.09,4728.95 3964.05,4728.95 v6(3989,4704)
  Top Layer w11.81: U62.31@1968.17,3656.76 1968.17,3568.83 2017,3520 2437,3520 2564,3393 3206,3393 3353,3540 3605,3540 3632,3567 4063,3567 v2(4090,3594)
  Bottom Layer w11.81: v6(3989,4704) 4025,4668 4025,4405 4062,4368 4062,3948 4090,3920 v2(4090,3594)
Netu57_74: U57.74 U62.32 | length 3860.2
  Top Layer w10: U57.74@3837.09,4748.64 4005,4748.64 v4(4023,4730.64)
  Top Layer w11.81: U62.32@1936.67,3656.76 1936.67,3554.33 2002,3489 2419,3489 2546,3362 3227,3362 3376,3511 3620,3511 3650,3541 4104,3541 v2(4130,3567)
  Bottom Layer w11.81: v4(4023,4730.64) 4058.5,4695.14 4058.5,4418.5 4091,4386 4091,3963 4129,3925 v2@4129,3568
Netu57_80: U57.80 U62.3 | length 4602.7
  Top Layer w10: U57.80@3837.09,4866.75 v4@3903.75,4866.75
  Top Layer w11.81: U62.3@1621.71,3223.69 1621.71,3076.29 1794,2904 2783,2904 2895,2922 3274,2954 3418,3012 3459,3029 3549,3091 3726,3103 ; 3726,3104 3756,3104 v2(3757,3105) ; v4@3903.75,4866.75 v4(3905,4868)
  Bottom Layer w11.81: v2@3756,3104 3879,3227 3989,3227 4166,3404 4166,3932 4126,3972 4126,4404 4095,4435 4095,4740 3967,4868 v4(3905,4868)
Netu57_84: U57.84 U62.17 | length 4179
  Top Layer w10: U57.84@3837.09,4945.49 v6(3917,4945.49)
  Top Layer w11.81: U62.17@2062.65,3223.69 2062.65,3308 2083.65,3329 2244,3329 2380,3193 v2(3886,3193)
  Bottom Layer w11.81: v2(3886,3193) 4008,3193 4204,3389 4204,3946 4160,3990 4160,4419 4130,4449 4130,4824 4009,4945 ; v6(3917,4945.49) 4007.49,4945.49
Netu57_85: U57.85 U62.4 | length 4795.1
  Top Layer w10: U62.4@1653.2,3223.69 1653.2,3098.8 1813,2939 2755,2939 2871,2951 3248,2976 3352,3020 3436,3053 3543,3123 v2(3868,3138) ; U57.85@3837.09,4965.17 3890.17,4965.17 3899,4974 v4(3946,4974)
  Bottom Layer w11.81: v2(3868,3138) 4004,3138 4237,3371 4237,3966 4194,4009 4194,4433 4166,4461 4166,4839 4031,4974 v4(3946,4974)
Netu57_87: U57.87 U61.7 | length 2235.3
  Top Layer w10: U57.87@3837.09,5004.54 3906.54,5004.54 v4@3907,5005
  Top Layer w11.81: U61.7@4125,3292.01 4125,3231 v1(4139,3217)
  Bottom Layer w11.81: v4(3907,5004.54) 4043.54,5004.54 4044,5005 4201,4848 4201,4474 4225,4450 4225,4032 4271,3986 4271,3331 4157,3217 v1(4139,3217)
Netu57_89: U57.89 U60.9 | length 1827.1
  Top Layer w11.81: U57.89@3766.23,5095.09 4201.91,5095.09 v6(4203,5094) ; U60.9@4037.99,3925 4174,3925 v4(4281,4032)
  Bottom Layer w11.81: v6(4203,5094) 4210,5094 4269,5035 4269,4516 4286,4499 4286,4037 v4(4281,4032)
Netu57_92: U57.92 U60.8 | length 1751
  Top Layer w10: 3707.17,5047.83 U57.92@3707.17,5095.09
  Top Layer w11.81: 3707.17,5047.83 v2(3721,5034) ; U60.8@4037.99,3975 4168,3975 v4(4258,4065)
  Bottom Layer w11.81: v2(3721,5034) 4123,5034 4237,4920 4237,4489 4258,4468 v4(4258,4065)
Netu57_96: U57.96 U62.35 | length 3515.4
  Top Layer w10: U57.96@3628.43,5095.09 3628.43,5239.43 v17(3658,5277)
  Top Layer w11.81: v2(1841,3738) 1842.18,3736.82 U62.35@1842.18,3656.76
  Bottom Layer w11.81: v2(1841,3738) 1841,3776 1929,3864 1929,4190 1989,4250 1989,4822 2032,4865 2063,4865 2191,4993 2191,5155 2457,5421 3556,5421 3658,5319 v17(3658,5277)
Netu57_97: U57.97 U62.36 | length 3645.8
  Top Layer w10: U57.97@3608.75,5095.09 3608.75,5260.75 3676,5328 v1(3676,5364)
  Top Layer w11.81: U62.36@1810.69,3656.76 v2(1810.69,3761.31)
  Bottom Layer w11.81: v2(1810.69,3761.31) 1810.69,4116 1831.34,4136.66 1832.66,4136.66 1958,4262 1958,4843 2007,4892 2046,4892 2161,5007 2161,5175 2433,5447 3593,5447 v1(3676,5364)
Netu57_103: U57.103 U62.5 | length 3862.5
  Top Layer w10: 3490.64,5048.64 U57.103@3490.64,5095.09
  Top Layer w11.81: U62.5@1685,3223.39 U62.5@1684.7,3223.69 1684.7,3121.3 1837,2969 v6(2582,2970)
  Bottom Layer w11.81: v6(2582,2970) 2750,3047 2750,4000 2965,4215 3269,4215 3318,4264 3318,4375 3382,4439 3382,5046 3404,5068 3441,5068 3470,5039 ; 3471,5039 v4(3491,5039)
Netu57_108: U57.108 U62.18 | length 3372.1
  Top Layer w10: U57.108@3392.21,5095.09 v2(3392.21,5283.79)
  Top Layer w11.81: v2(2090,3296) 2090,3283 2094.15,3278.85 U62.18@2094.15,3223.69
  Bottom Layer w11.81: v2(2090,3296) 2090,3371 2212,3493 2212,3769 2238,3795 2238,4065 2435,4262 2435,5214 2580,5359 3317,5359 v2(3392.21,5283.79)
Netu57_110: U57.110 U61.2 | length 2819.9
  Top Layer w10: U57.110@3352.84,5095.09 3352.84,5141.84 v4(3360,5149)
  Top Layer w11.81: v1@4313,3387 4375,3325 U61.2@4375,3292.01
  Bottom Layer w11.81: v4(3360,5149) 4199,5149 4301,5047 4301,4540 4311,4530 v1(4311,3392)
Netu57_111: U57.111 U62.19 | length 3231
  Top Layer w10: U57.111@3333.16,5095.09 3333.16,5199.16 ; 3334.38,5199.16 3336.28,5201.06 v4(3336.28,5268.72)
  Top Layer w11.81: v2(2123,3296) 2123,3226.34 U62.19@2125.65,3223.69
  Bottom Layer w11.81: v2(2123,3296) 2123,3361 2235,3473 2235,3747 2268,3780 2268,4048 2469,4249 2469,5186 2610,5327 3278,5327 v4(3336.28,5268.72)
Netu57_118: U57.118 U62.20 | length 3004
  Top Layer w11.81: U62.20@2157.14,3223.69 v2(2157.14,3293) ; U57.118@3195.36,5095.09 v4(3195.36,5249.36)
  Bottom Layer w11.81: v2(2157.14,3293) 2157.14,3350.14 2258,3451 2258,3729 2300,3771 2300,4035 2502,4237 2502,5157 2645,5300 2946,5300 3144.72,5300 v4(3195.36,5249.36)
Netu57_121: U57.121 U62.21 | length 2869.7
  Top Layer w10: v17(3124,5260) 3136.31,5247.69 U57.121@3136.31,5095.09
  Top Layer w11.81: U62.21@2188.64,3223.69 v2(2188.64,3288)
  Bottom Layer w11.81: v2(2188.64,3288) 2188.64,3338.64 2281.5,3431.5 2281.5,3699.5 2327,3745 2327,4011 2539,4223 2539,4814 2566,4841 2566,5159 2677,5270 3114,5270 v17(3124,5260)
Netu57_125: U57.125 U62.22 | length 2680.6
  Top Layer w11.81: U62.22@2220.13,3223.69 v2(2220.13,3272) ; U57.125@3057.57,5095.09 3057.57,5043.43 v4(3058,5043)
  Bottom Layer w11.81: v2(2220.13,3272) 2220.13,3331.13 2325,3436 2325,3699 2359,3733 2359,3992 2577,4210 2577,4799 2603,4825 2603,5127 2670,5194 2943,5194 3058,5079 v4(3058,5043)
Netu57_130: U57.130 U62.23 | length 1994.8
  Top Layer w10: v2(2953,5040) 2959.14,5046.14 U57.130@2959.14,5095.09
  Top Layer w11.81: U62.23@2220.13,3656.76 2220.13,3773.13 2263,3816 v1@2676,3816
  Bottom Layer w11.81: v1(2676,3814) 2687,3814 2713,3840 2713,4013 2953,4253 v2(2953,5040)
Netu57_132: U57.132 U62.24 | length 1993.4
  Top Layer w11.81: U62.24@2188.64,3656.76 2189,3657.13 2189,3814 2229,3854 2631,3854 ; 2632,3853 2631,3854 ; v1@2662,3854 2631,3854 ; v2(2919.77,5034.23) U57.132@2919.77,5095.09
  Bottom Layer w11.81: v1(2664,3856) 2683,3875 2683,4031 2919.77,4267.77 v2(2919.77,5034.23)
Netu57_133: U57.133 U62.6 | length 2811.8
  Top Layer w10: 2551,5128 2654.77,5024.23 U57.133@2848.91,5024.23
  Top Layer w11.81: U62.6@1716.2,3223.69 1716.2,3300.2 1796,3380 v1(1954,3380) ; v8(2407,5105) 2430,5128 2551,5128
  Bottom Layer w11.81: v1(1954,3380) 2052,3380 2184,3512 2184,3778.5 2208,3802.5 2208,4078 2405,4275 2405,5103 v8(2407,5105)
Netu57_138: U57.138 U62.25 | length 2024.7
  Top Layer w10: v8(2337.5,5022.5) 2345,5030 2608,5030 2712.2,4925.8 U57.138@2848.91,4925.8
  Top Layer w11.81: v2(2126,3844) 2126,3826 2157.14,3794.86 U62.25@2157.14,3656.76
  Bottom Layer w11.81: v2(2126,3844) 2125,3845 2125,4122 2310,4307 2310,4995 v8(2337.5,5022.5)
Netu57_139: U57.139 U62.37 | length 2280.8
  Top Layer w10: v4(2103,4993) 2106,4996 2604.77,4996 2694.65,4906.12 U57.139@2848.91,4906.12
  Top Layer w11.81: U62.37@1779.19,3656.76 1779.19,3720.19 v2(1780,3721)
  Bottom Layer w11.81: v2(1780,3721) 1780,4137 1781,4137 1927,4283 1927,4859 1991,4923 1992,4922 2032,4922 v4(2103,4993)
Netu57_141: U57.141 U62.26 | length 1764.8
  Top Layer w10: v6(2374,4853) 2551.25,4866.75 2637.25,4866.75 U57.141@2848.91,4866.75
  Top Layer w11.81: U62.26@2125.65,3656.76 2125.65,3758.65 v2(2127,3760)
  Bottom Layer w11.81: v2(2127,3760) 2127,3797 2152,3822 2152,4109 2341,4298 2341,4716 v6(2374,4853)
Netu57_144: U57.144 U62.27 | length 1776.3
  Top Layer w10: 2360,4818.1 2787,4825 2804.31,4807.69 U57.144@2848.91,4807.69
  Top Layer w11.81: U62.27@2094.15,3656.76 v2(2094.15,3724.85) ; v11(2280,4739) 2286.34,4773 2360,4818.1
  Bottom Layer w11.81: v2(2094.15,3724.85) 2094.15,4130.15 2280,4316 v11(2280,4739)
Netu57_147: U57.147 U62.38 | length 1977.8
  Top Layer w10: v48@2216,4571 2328,4683 2600,4683 2665.64,4748.64 U57.147@2848.91,4748.64
  Top Layer w11.81: U62.38@1747.69,3656.76 v2(1747.69,3730.31) ; v1(1831,4253) 2048,4253 v6(2050,4255) ; U57.147@2815,4748.64 U57.147@2848.91,4748.64
  Bottom Layer w11.81: v2@1746,3732 v2(1747.69,3730.31) 1747.69,4177 1823.69,4253 v1(1831,4253) ; v6(2050,4255) 2050,4258 2173,4381 2173,4522 v48@2217,4566
  other v48: 2217,4570
Netu57_148: U57.148 U62.42 | length 2016.6
  Top Layer w10: v11@2247.5,4556.5 2349,4658 2609,4658 2679.95,4728.95 U57.148@2848.91,4728.95
  Top Layer w11.81: U62.42@1621.71,3656.76 v2@1621.71,3714.71 ; v1(1732,4220) 2060,4220 v6(2063,4223)
  Bottom Layer w11.81: v2(1621,3721) 1621,4109 v1(1732,4220) ; v6(2063,4223) 2198,4358 2198,4505 v11@2248,4555
  other v11: 2248,4556
Netu57_151: U57.151 U61.8 | length 5512.2
  Top Layer w10: v6(2252,4511) 2375.9,4634.9 2733,4634.9 2768,4669.9 U57.151@2848.91,4669.9
  Top Layer w11.81: v31@1545,2962 1712,2795 2769,2805 2906,2875.09 3379,2882 3557,3060 3997,3060 4080,3143 4080,3287.01 U61.8@4075,3292.01
  Bottom Layer w11.81: v31(1544,2961) 1544,3547 1628,3631 1838,3631 2042,3835 2042,4114 2254,4326 v6@2254,4513
Netu57_152: U57.152 U62.43 | length 1946.6
  Top Layer w10: v6(2225,4448) 2386,4609 2738,4609 2779.21,4650.21 U57.152@2848.91,4650.21
  Top Layer w11.81: v6(1590,3992) 1712,4181 v6(2062,4181) ; U62.43@1590.21,3656.76 v2@1590.21,3735.21
  Bottom Layer w11.81: v2(1590,3741) v6(1590,3992) ; v6(2062,4181) 2225,4344 v6(2225,4448)
Netu57_155: U57.155 U61.9 | length 3863.3
  Top Layer w10: 2420,4582 2750,4582 2759.16,4591.16 U57.155@2848.91,4591.16
  Top Layer w11.81: v41@2065,3425 2375,3425 2497,3303 3853,3303 3918,3368 3991.85,3368 4027,3332.85 4027,3303.01 U61.9@4021,3297.01 ; v6(2375,4537) 2420,4582
  Bottom Layer w11.81: v41(2058,3425) 2018.5,3464.5 2018.5,3609.5 2158,3749 2158,3791 2179,3812 2179,4096 2374,4291 v6@2374,4536
Netu57_156: U57.156 U62.44 | length 1736.4
  Top Layer w10: 2616,4555 2766,4555 2782.47,4571.47 U57.156@2848.91,4571.47
  Top Layer w11.81: U62.44@1558.72,3656.76 1558.72,3767 1706,3895 1833,3985 1995,4147 v6(1995,4149) ; v2(2143,4400) 2242,4420 2616,4555
  Bottom Layer w11.81: v6(1995,4149) 2014,4270 2143,4399 v2(2143,4400)
PA_DN: R73.1 U60.13 | length 1097.3
  Top Layer w27.56: U60.13@4412.01,3975 4361,3975 4314,3928 4314,3847 4363,3798 4402,3798 v32(4568,3632)
  Bottom Layer w27.56: v32@4567,3632 4567,3352 R73.1@4762,3157
PA_OC_DOWN: CON1.14 R80.2 | length 1686.5
  Top Layer w27.56: R80.2@5907,3832 5969,3832 6046,3909 6485,3909 6513,3881 7526,3881 CON1.14@7543,3898
PA_OC_UP: CON1.6 R79.2 | length 1389.2
  Top Layer w27.56: R79.2@6424,3187 6424,3172 6569,3027 6855,3027 7309,3481 7526,3481 CON1.6@7543,3498
PA_UP: U28.3 U60.14 | length 1748.5
  Top Layer w27.56: U60.14@4412.01,4025 4578,4025 4635,3968 4635,3826 v7(4634,3825) ; v7(4709,3390) 5505.67,3390 U28.3@5573.67,3322
  Bottom Layer w27.56: v7@4635,3825 4635,3464 v7(4709,3390)
PB_DN: R72.1 U60.15 | length 1007.7
  Top Layer w27.56: U60.15@4412.01,4075 4886,4075 4899,4062 5157,4062 5247,3972 R72.1@5247,3842
PB_OC_DOWN: CON1.20 R84.2 | length 1292
  Top Layer w27.56: R84.2@6372,4462 6412,4462 6430,4444 6739,4444 6999,4184 7529,4184 CON1.20@7543,4198
PB_OC_UP: CON1.8 R83.2 | length 1994.7
  Top Layer w27.56: R83.2@5852,3177 5831,3198 5831,3347 5896,3412 6142,3412 6177,3447 7072,3447 7208,3583 7528,3583 CON1.8@7543,3598
PB_UP: U26.3 U60.16 | length 1213.4
  Top Layer w27.56: U60.16@4412.01,4125 4927.83,4125 4939.83,4113 5449.33,4113 U26.3@5570.33,3992
PC_DN: R70.1 U60.17 | length 761.2
  Top Layer w27.56: U60.17@4412.01,4175 4523,4175 4720,4372 v5(4802,4372)
  Bottom Layer w27.56: v5(4802,4372) R70.1@4982,4552 4982,4517
PC_OC_DOWN: CON1.22 R88.2 | length 704.3
  Top Layer w27.56: R88.2@6907,4427 7054,4280 7525,4280 CON1.22@7543,4298
PC_OC_UP: CON1.12 R87.2 | length 633.4
  Top Layer w27.56: R87.2@6922,3802 6939,3785 7530,3785 CON1.12@7543,3798
PC_UP: U24.3 U60.18 | length 1655.5
  Top Layer w20: U60.18@4412.01,4225 4507,4225 v1(4545,4263) ; v20(4544,4658) 4674,4788 5531,4788 U24.3@5567,4752
  Top Layer w27.56: U24.3@5567,4732 U24.3@5567,4752
  Bottom Layer w20: v1@4544,4263 v20(4544,4658)
POS_A: C49.2 R43.2 U57.20 U57.60 | length 4115.2
  Top Layer w10: v11(2827,2584) 2945,1849 3068,1488 C49.2@3160,1140 ; v11(3269,3946) 3283,3984 3293,4047 U57.20@3293.79,4106.91 3293.79,4309.79 3471,4487 3563,4487 3576.95,4473.05 U57.60@3837.09,4473.05
  Top Layer w20: R43.2@2980,1131 C49.2@3151,1131
  Bottom Layer w10: v11(2827,2584) 2871,2765 3027,2993 3205,3297 3261,3607 v11(3269,3946)
POS_B: C51.2 R46.2 U57.22 U57.59 | length 3859.2
  Top Layer w10: v11(2860,2980) 3135.92,2993.92 v11(3143,3001) ; v9(3333.16,3870.84) U57.22@3333.16,4106.91 3333.16,4314.16 3482,4455 3531,4455 3540.64,4453.36 U57.59@3837.09,4453.36
  Top Layer w11.81: R46.2@2373,1605 2526,1605 C51.2@2528,1607 2528,1750 v11(2558,1780)
  Bottom Layer w10: v11(2558,1780) 2632,1854 2632,2016 2655,2678 2764,2862.67 v11(2860,2980) ; v11(3143,3001) 3327,3237 v9(3333.16,3870.84)
POS_C: C54.2 R52.2 U57.29 U57.57 | length 3929.4
  Top Layer w10: v9(2072,2295) 2128,2314 2211,2343 2456,2590 2503,2628 v9(2576,2686) ; v4(3464,4058) 3470.95,4064.95 U57.29@3470.95,4106.91 3470.95,4221.95 3662.99,4413.99 U57.57@3837.09,4413.99
  Top Layer w11.81: R52.2@1638,1721 1787,1721 C54.2@1790,1718 1807,1794 v9(1817,1827)
  Bottom Layer w10: v9(1817,1827) 1860,2008 v9(2072,2295) ; v9(2576,2686) 2576,2682 2827,3012 2927,3727 3001,3801 3121,3801 3165,3845 3165,3922 3301,4058 v4(3464,4058)
RS232_RX_OUT: P15.2 TVS4.1 U56.8 | length 524.9
  Top Layer w27.56: U56.8@5426.46,6550 5694.29,6550 TVS4.1@5699.29,6555 ; 5475,6555 P15.2@5475,6805
RS232_TX_OUT: P15.3 TVS5.1 U56.7 | length 1139.9
  Top Layer w27.56: P15.3@5675,6805 5578,6902 5424,6902 5381,6859 5381,6794 5334,6747 5334,6528 5362,6500 U56.7@5426.46,6500 5572,6500 5632,6440 5664.29,6440 TVS5.1@5714.29,6390
T\E\S\T\: P9.2 U57.135 | length 1510.4
  Top Layer w10: v17(2785,4993) 2793.14,4984.86 U57.135@2848.91,4984.86
  Top Layer w11.81: v1(2795,5085) 2795,5538 2905,5639 3123,5661 3356,5876 v1(3359,5879)
  Bottom Layer w11.81: v17(2785,4993) 2785,5060 2795,5070 v1(2795,5085) ; v1(3359,5879) 3462,5979 P9.2@3462,6039.67
TCK: P9.9 P9.11 U57.136 | length 1429.3
  Top Layer w10: 2759.83,4965.17 U57.136@2848.91,4965.17
  Top Layer w11.81: v9(2752,4973) 2759.83,4965.17 ; v1(2758,5089) v1(2759,5602) ; P9.11@2962,6139.67 P9.9@3062,6139.67
  Bottom Layer w11.81: v9(2752,4973) 2752,5063 2758,5069 v1(2758,5089) ; v1(2759,5602) 2810,5854 2913,5988 2914,6091.67 P9.11@2962,6139.67
TDI: P9.3 U57.131 | length 1316.9
  Top Layer w10: U57.131@2939.46,5095.09 2939.46,5226.54
  Top Layer w11.81: 2939.46,5226.54 2939.46,5508.46 2968,5537 3136,5537 v1(3155,5556)
  Bottom Layer w11.81: v1(3155,5556) 3314,5714 3314,6086.67 P9.3@3362,6139.67
TDO: P9.7 U57.127 | length 1157.4
  Top Layer w10: U57.127@3018.2,5095.09 3018.2,5238.2 3059,5279
  Top Layer w11.81: 3059,5279 3059,5460 v1(3078,5479)
  Bottom Layer w11.81: v1(3078,5479) 3078,5823 3214,5959 3214,6105 3179.33,6139.67 P9.7@3162,6139.67